# Altium PCB PowerModul_2.PcbDoc
Units mil, origin at the board's own origin, x right, y up, seen from the top; angles counter-clockwise.
Board outline 6030.62 x 3010.62 mil, 4 copper layers (Top Layer, Layer 1, Layer 2, Bottom Layer), stack 23.756 mil thick; 119 components, 43 nets, 313 pads, 578 vias.
Unrouted connection lines stored in the file: 4.
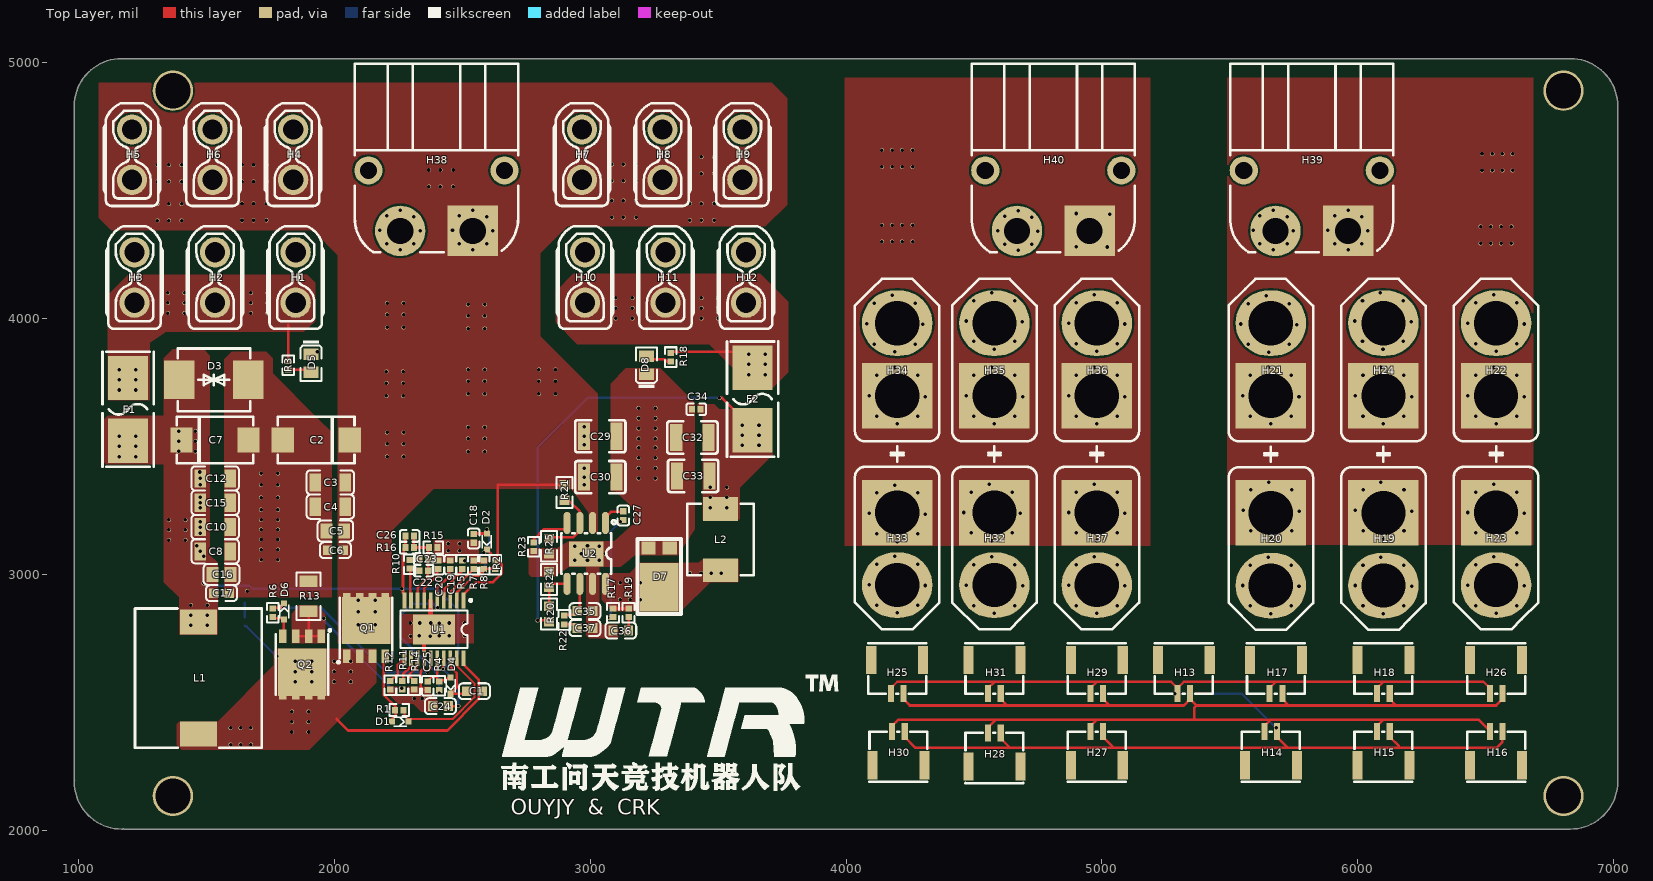
[diagram p0: Top Layer view]
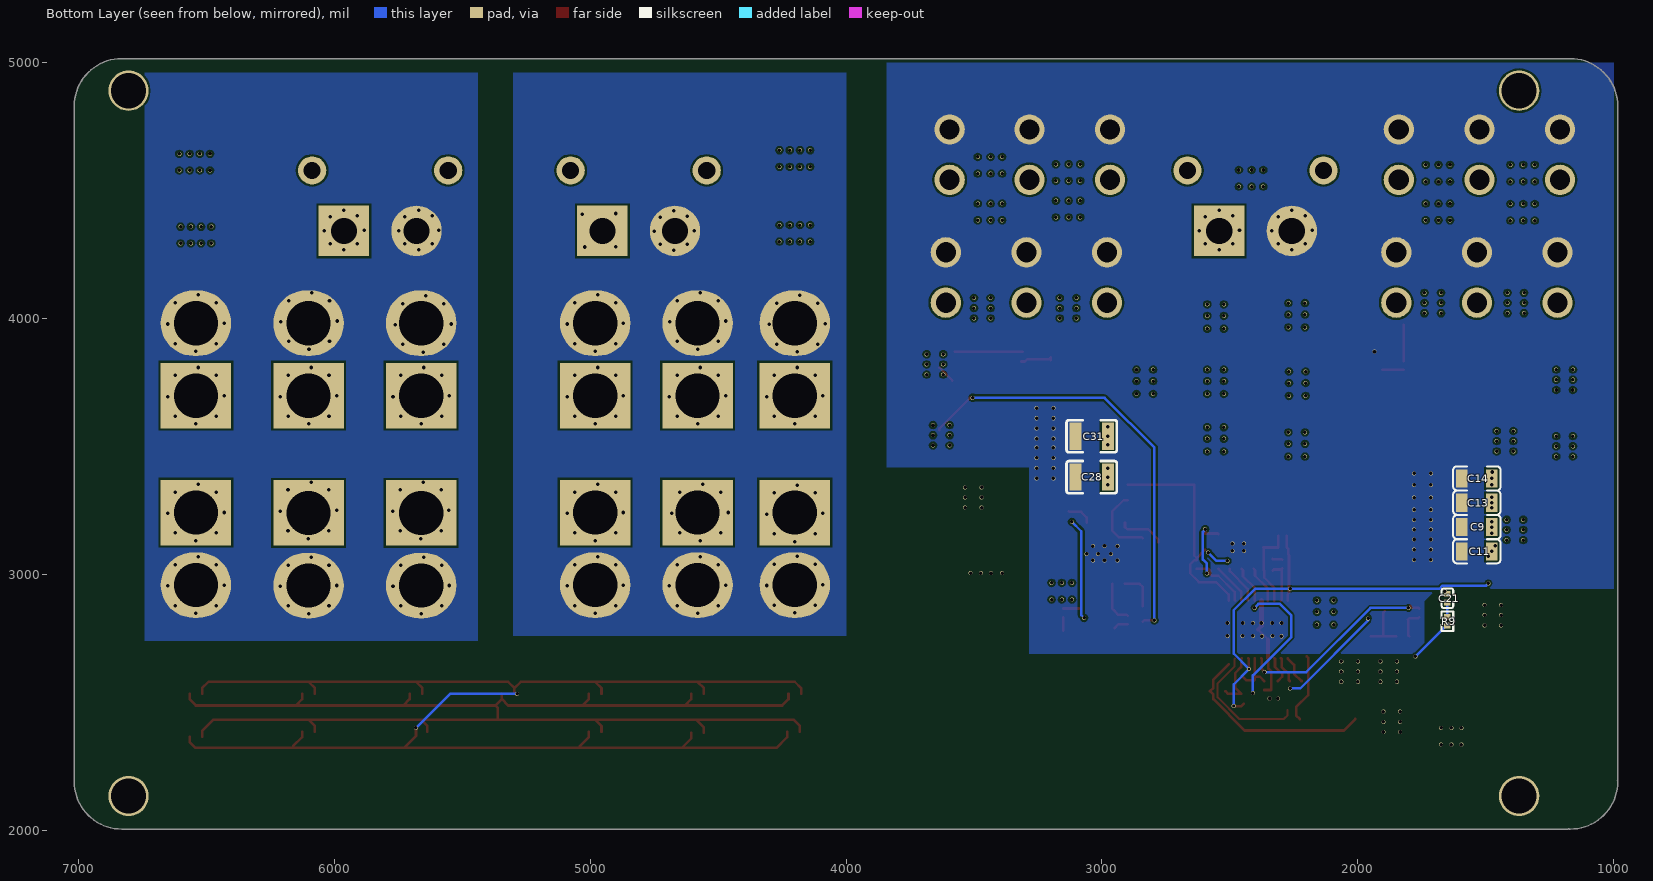
[diagram p1: Bottom Layer view, seen from below]
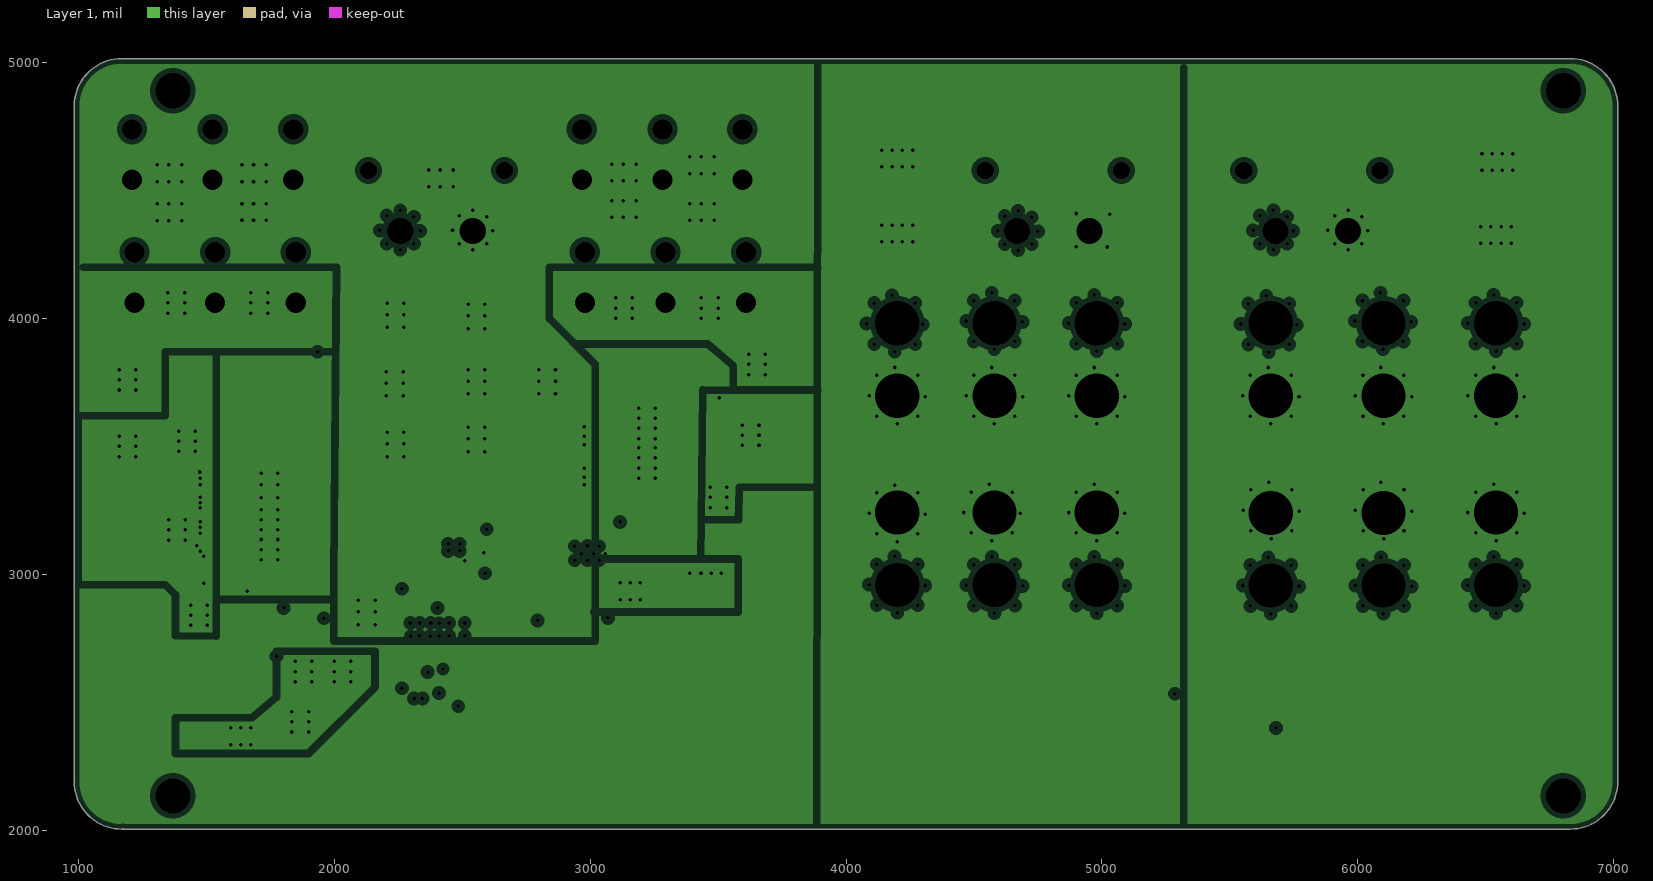
[diagram p2: Layer 1, clearances drawn from the general rule]
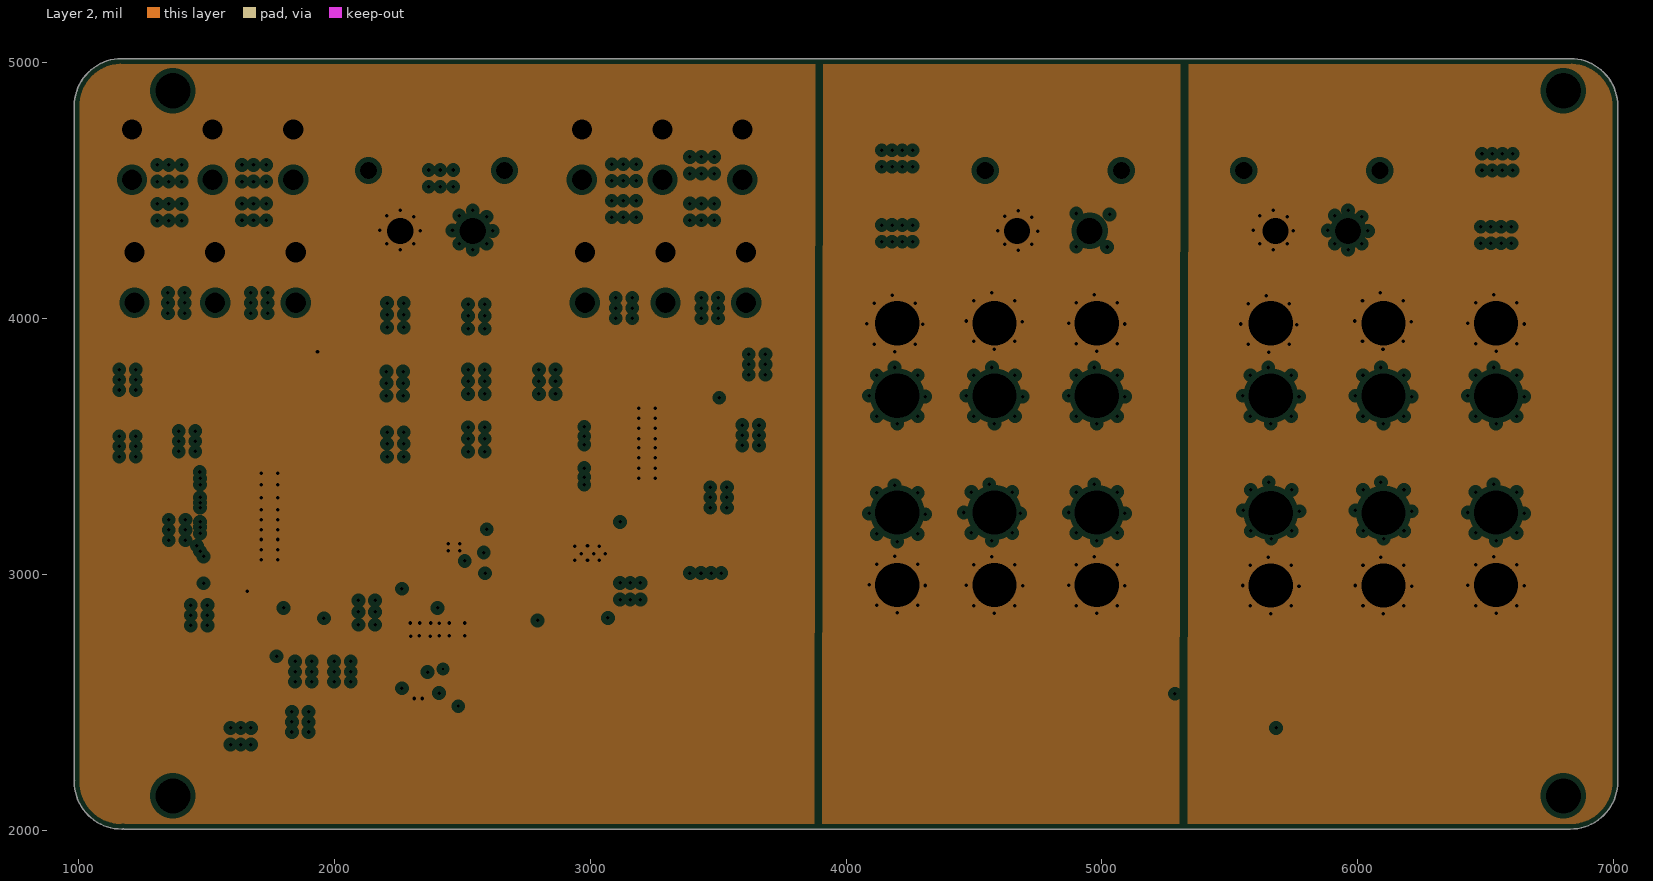
[diagram p3: Layer 2, clearances drawn from the general rule]
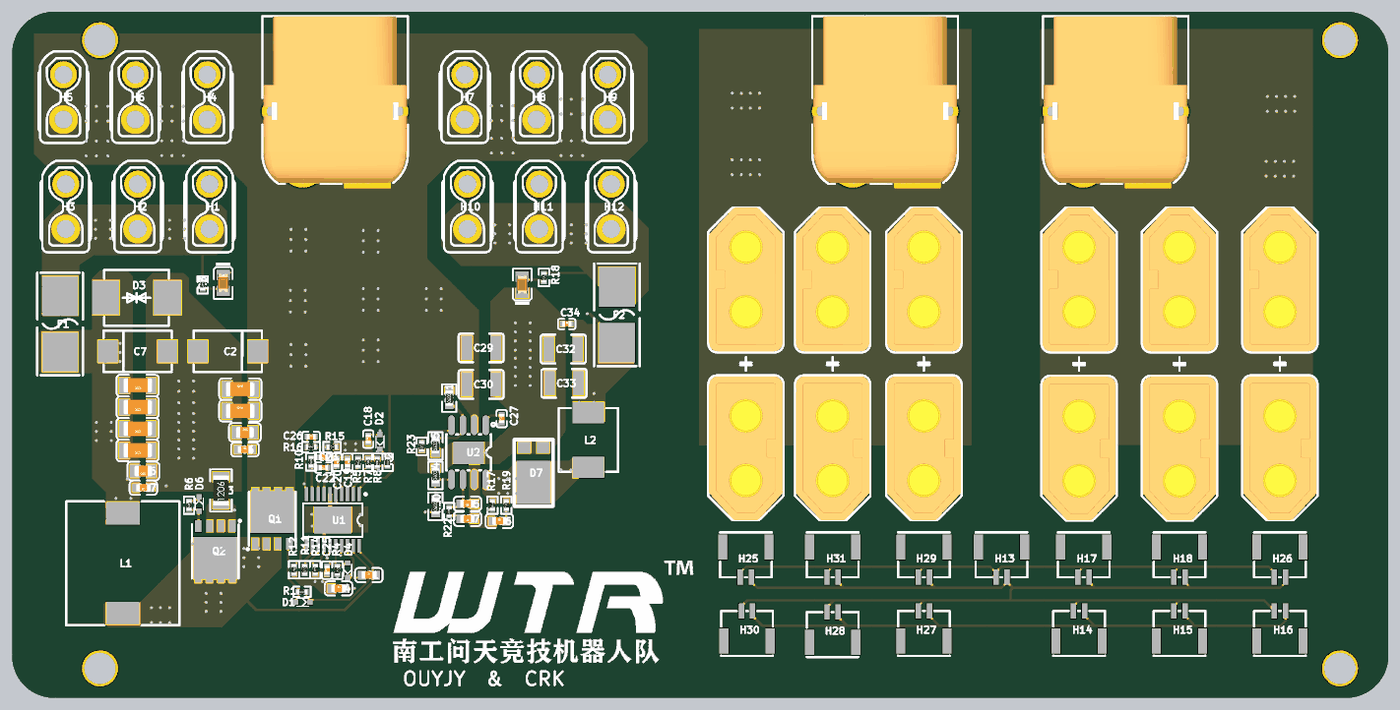
[diagram p4: 3D render of the assembled board from above, using the file's embedded part models]
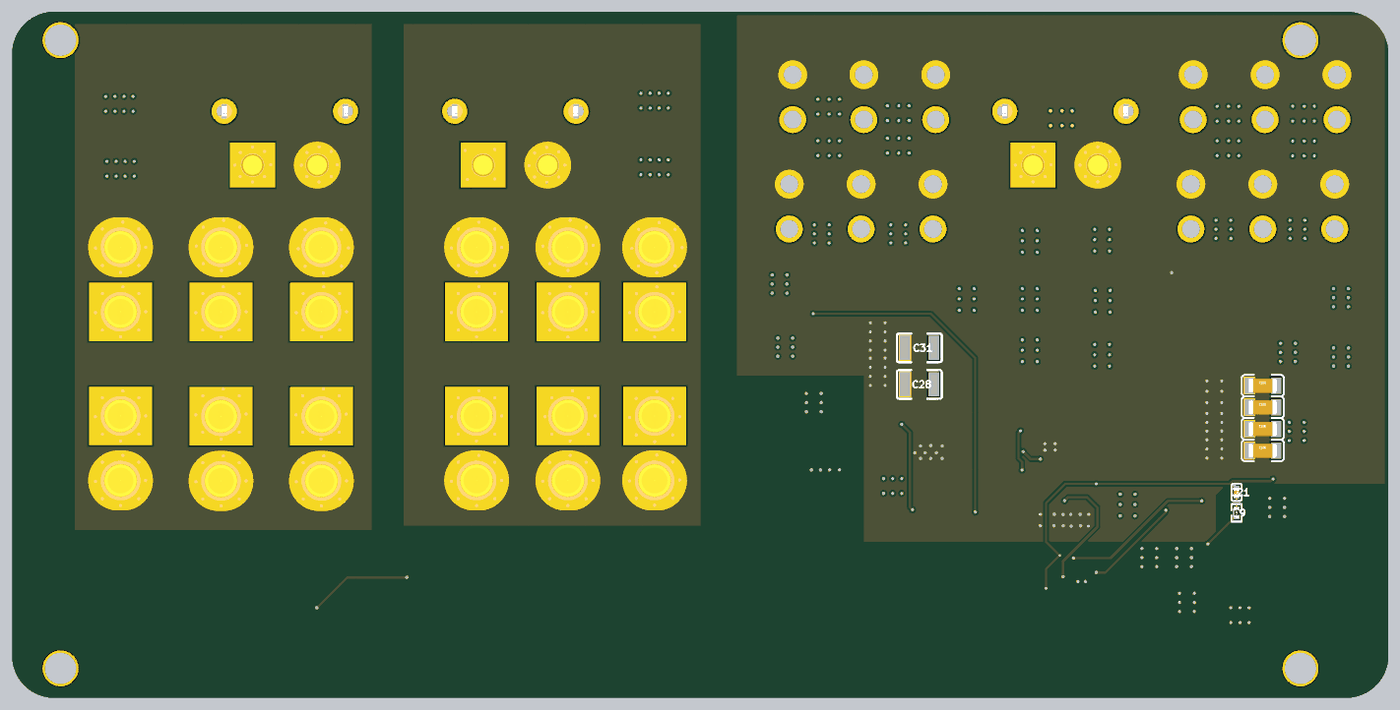
[diagram p5: 3D render of the assembled board from below, using the file's embedded part models]

## Layer stack, top to bottom
Top Solder: solder mask 0.4, Solder Resist, Dk 3.5
Top Layer: signal copper 1.4
Dielectric 2: prepreg 2.8, PP-006, Dk 4.1
Layer 1: plane copper 1.3779, net (Multiple Nets)
Dielectric 1: dielectric 12.6, FR-4, Dk 4.8
Layer 2: plane copper 1.3779, net (Multiple Nets)
Dielectric 3: prepreg 2.8, PP-006, Dk 4.1
Bottom Layer: signal copper 1.4
Bottom Solder: solder mask 0.4, Solder Resist, Dk 3.5

## Board outline
984.69,2190 cw(c999.71,2190) 985.7,2195.42 cw(c1000,2200) 984.99,2200 984.99,4827.04 cw(c999.71,4830) 984.69,4830 cw(c1170,4830) 1170,5015.31 cw(c1170,5000.29) 1172.96,5015.02 6827.04,5015.02 cw(c6830,5000.29) 6830,5015.31 cw(c6830,4830) 7015.31,4830 cw(c7000.29,4830) 7015.02,4827.04 7015.02,2192.96 cw(c7000.29,2190) 7015.31,2190 cw(c6830,2190) 6830,2004.69 cw(c6830,2019.71) 6827.04,2004.98 1180,2004.98 cw(c1180,2020) 1175.42,2005.7 cw(c1170,2019.71) 1170,2004.69 cw(c1170,2190)

## Design rules (kind name [scope] priority, off if disabled: settings)
Clearance [All] p1: gap=8 ignorepadtopadclearanceinfootprint=TRUE
HoleSize [All] p1: absolutevalues=TRUE maxlimit=100 minlimit=6 maxpercent=80.000 minpercent=20.000
MinimumSolderMaskSliver [All] p1: minsoldermaskwidth=0
PlaneClearance [All] p1: clearance=20
PlaneConnect [All] p1: planeconnectstyle=Direct reliefexpansion=20 reliefentries=4 reliefconductorwidth=10 reliefairgap=10
PolygonConnect [All] p1: connectstyle=Direct reliefconductorwidth=10 reliefentries=4 polygonreliefangle="90 Angle" airgapwidth=10
RoutingVias [All] p1: holewidth=11.81 width=15.75 viastyle="Through Hole" minholewidth=11.81 minwidth=15.75 maxholewidth=354.33 maxwidth=393.7
SilkToSilkClearance [All] p1: silktosilkclearance=0
SilkToSolderMaskClearance [IsPad] p1: minsilkscreentomaskgap=0 clearancetoexposedcopper=TRUE
SolderMaskExpansion [All] p1: expansion=4
Width [All] p1: maxlimit=100 minlimit=8 preferedwidth=10 minimp=50.000000 maximp=50.000000 favimp=50.000000
24 further rules are at their usual default settings.

## Components (designator, comment, footprint, x,y, rotation, side; value= is the part's Value field where it differs from the comment)
C1 "1uF 50V 0603" 0603_C 2547.91,2543.5 r0 top
C2 "22uF 35V 钽电容" CAP-SMD_L7.3-W4.3-R-RD 1930,3525 r0 top
C3 "4.7uF 50V 1206" 1206_C 1985,3359.48 r0 top
C4 "4.7uF 50V 1206" 1206_C 1985,3264.48 r0 top
C5 "1uF 50V 0805" 0805_C 2005,3169.48 r0 top
C6 "0.1uF 50V 0603" 0603_C 2005,3094.48 r0 top
C7 "22uF 35V 钽电容" CAP-SMD_L7.3-W4.3-R-RD 1535,3525 r180 top
C8 "22uF 25V" 1206_C 1535,3090 r180 top
C9 "22uF 25V" 1206_C 1535,3185 r180 bottom
C10 "22uF 25V" 1206_C 1535,3185 r180 top
C11 "22uF 25V" 1206_C 1535,3090 r180 bottom
C12 "22uF 25V" 1206_C 1535,3375 r180 top
C13 "22uF 25V" 1206_C 1535,3280 r180 bottom
C14 "22uF 25V" 1206_C 1535,3375 r180 bottom
C15 "22uF 25V" 1206_C 1535,3280 r180 top
C16 "1uF 50V 0805" 0805_C 1560,3000 r180 top
C17 "100nF 50V 0603" 0603_C 1560,2926.5 r180 top
C18 "1uF" 0402_C 2545.2,3140.32 r90 top
C19 "270pF" 0402_C 2454.53,3038.27 r270 top
C20 "10nF" 0402_C 2406.73,3038.27 r270 top
C21 "470pF" 0402_C 1650,2906.73 r270 bottom
C22 "100pF" 0402_C 2350,3015 r180 top
C23 "3.3nF" 0402_C 2350,3060 r180 top
C24 "1uF 0603 50V" 0603_C 2415,2485 r0 top
C25 "1uF" 0402_C 2365,2565 r90 top
C26 "330pF" 0402_C 2295,3150 r0 top
C27 "100nF" 0402_C 3130,3230 r90 top
C28 "4.7uF 1210 50V" C1210 3040,3380 r180 bottom
C29 "4.7uF 1210 50V" C1210 3040,3540 r180 top
C30 "4.7uF 1210 50V" C1210 3040,3380 r180 top
C31 "4.7uF 1210 50V" C1210 3040,3540 r180 bottom
C32 "100uF 6.3V 1210" C1210 3399.91,3535 r0 top
C33 "100uF 6.3V 1210" C1210 3402.9,3384.72 r0 top
C34 "100nF 0402 25V" 0402_C 3415,3645 r0 top
C35 "47pF" 0603_C 2980,2856.34 r180 top
C36 "100pF" 0603_C 3120,2780.46 r0 top
C37 "4.7nF" 0603_C 2980,2790 r180 top
D1 "BAS516" SOD-523_L1.2-W0.8-LS1.6-RD 2258.27,2425 r180 top
D2 "BAS516" SOD-523_L1.2-W0.8-LS1.6-RD 2596.73,3128.27 r90 top
D3 "SMCJ12CA C78808" SMC_L6.9-W5.9-LS7.9-BI 1530,3760 r180 top
D4 "BAS516" SOD-523_L1.2-W0.8-LS1.6-RD 2455,2565 r90 top
D5 "Green" 0805_LED_S1 1910,3825 r270 top
D6 "BAS516" SOD-523_L1.2-W0.8-LS1.6-RD 1805,2855 r270 top
D7 "SVM860VB" TO-277B_3P-L6.1-W4.3-LS7.0-BR 3270,3026.1 r90 top
D8 "Green" 0805_LED_S1 3220,3817.5 r90 top
F1 "FUSE C206921" FUSE-SMD_L9.8-W5.1 1195,3645 r90 top
F2 "FUSE C206916" FUSE-SMD_L9.8-W5.1 3635,3685 r90 top
H1 "2P" XT30UPB-F 1849.92,4160 r90 top
H2 "2P" XT30UPB-F 1534.96,4160 r90 top
H3 "2P" XT30UPB-F 1220,4160 r90 top
H4 "2P" XT30UPB-F 1840,4640 r90 top
H5 "2P" XT30UPB-F 1210.07,4640 r90 top
H6 "2P" XT30UPB-F 1525.04,4640 r90 top
H7 "2P" XT30UPB-F 2968.27,4640 r90 top
H8 "2P" XT30UPB-F 3283.23,4640 r90 top
H9 "2P" XT30UPB-F 3594.96,4640 r90 top
H10 "2P" XT30UPB-F 2980,4160 r90 top
H11 "2P" XT30UPB-F 3294.96,4160 r90 top
H12 "2P" XT30UPB-F 3609.92,4160 r90 top
H13 "2P" GH1.25-S-2P 5320,2600 r180 top
H14 "2P" GH1.25-S-2P 5660,2320 r0 top
H15 "2P" GH1.25-S-2P 6100,2320 r0 top
H16 "2P" GH1.25-S-2P 6540,2320 r0 top
H17 "2P" GH1.25-S-2P 5680,2600 r180 top
H18 "2P" GH1.25-S-2P 6100,2600 r180 top
H19 "2P" TX60-LI-P 6100,3098.27 r270 top
H20 "2P" TX60-LI-P 5660,3098.27 r270 top
H21 "2P" TX60-LI-P 5660,3840 r90 top
H22 "2P" TX60-LI-P 6540,3840 r90 top
H23 "2P" TX60-LI-P 6540,3100 r270 top
H24 "2P" TX60-LI-P 6100,3840 r90 top
H25 "2P" GH1.25-S-2P 4200,2600 r180 top
H26 "2P" GH1.25-S-2P 6540,2600 r180 top
H27 "2P" GH1.25-S-2P 4980,2320 r0 top
H28 "2P" GH1.25-S-2P 4580,2315 r0 top
H29 "2P" GH1.25-S-2P 4980,2600 r180 top
H30 "2P" GH1.25-S-2P 4205,2320 r0 top
H31 "2P" GH1.25-S-2P 4580,2600 r180 top
H32 "2P" TX60-LI-P 4580,3100 r270 top
H33 "2P" TX60-LI-P 4200,3100 r270 top
H34 "2P" TX60-LI-P 4200,3840 r90 top
H35 "2P" TX60-LI-P 4580,3840 r90 top
H36 "2P" TX60-LI-P 4980,3840 r90 top
H37 "2P" TX60-LI-P 4980,3100 r270 top
H38 "2P" TX60PW-M20 2400,4460 r180 top
H39 "2P" TX60PW-M20 5820,4460 r180 top
H40 "2P" TX60PW-M20 4810,4460 r180 top
L1 "10uH 10A C150112" IND-SMD_L13.8-W12.6_SMMS1360 1470,2595 r90 top
L2 "6.8uH 5A" IND-SMD_L7.1-W6.6 3510,3136.1 r90 top
Q1 "BSC067N06LS3" PG-TDSON-8_L5.0-W6.0-P1.27-LS6.2-BL-EP 2125,2791 r0 top
Q2 "BSC067N06LS3" PG-TDSON-8_L5.0-W6.0-P1.27-LS6.2-BL-EP 1875,2647.27 r180 top
R1 "4.7R" 0402_R 2255,2470 r0 top
R2 "100K 0402" 0402_R 2630,3038.27 r90 top
R3 "4.7K" 0402_R 1820,3816.69 r270 top
R4 "511K" 0402_R 2410,2565 r90 top
R5 "1M 0201" 0402_R 2500.2,3038.27 r90 top
R6 "4.7R" 0402_R 1760,2850 r90 top
R7 "12.4K 0402" 0402_R 2545.2,3038.27 r270 top
R8 "10K 0402" 0402_R 2585,3038.27 r270 top
R9 "10R" 0402_R 1650,2816.73 r90 bottom
R10 "17.8K" 0402_R 2295,3040 r90 top
R11 "0R" 0402_R 2266.73,2566.73 r270 top
R12 "10K" 0402_R 2220,2566.73 r90 top
R13 "4mR 1206 1%" 1206_R 1900,2915 r90 top
R14 "0R" 0402_R 2313.35,2566.73 r270 top
R15 "1.21K 1%" 0402_R 2386.73,3105 r180 top
R16 "10.7K 1%" 0402_R 2295,3105 r180 top
R17 "0R" 0402_R 3089.69,2850 r90 top
R18 "1K" 0402_R 3315,3849.04 r270 top
R19 "100R" 0402_R 3150.31,2850 r270 top
R20 "40.2K 0603 1%" 0603_R 2840,2845.31 r90 top
R21 "309K 0603" 0603_R 2900,3320 r90 top
R22 "17.8K" 0402_R 2900,2821.73 r270 top
R23 "243K" 0402_R 2780,3108.27 r90 top
R24 "7.68K 0603 1%" 0603_R 2840,2980.31 r90 top
R25 "68K 0603" 0603_R 2840,3110 r90 top
U1 "LM25116MHX/NOPB" HTSSOP-20_L6.5-W4.4-P0.65-LS6.4-BL-EP 2390,2785 r180 top
U2 "TPS54540DDAR" SOIC-8-EP 2985,3082 r180 top
? "Comment" WTR_LOGO 2660,2160 r0 top

## Footprints (in the part's own frame and the unit in brackets; to place one, negate y for a bottom-side part, rotate by r counter-clockwise, add the part's x,y. Pads: shape width x height; smd on the part's side, far side on the other; paste and mask are expansions set on the pad)
0402_C [mm]
  rect 0.6x0.65 smd mask+0.051: 1(-0.425,0) 2(0.425,0)
  silkscreen extent -0.97,-0.58 0.98,0.58, body extent -0.48,-0.3 0.52,0.3, height 0.2
0402_R [mm]
  rect 0.6x0.65 smd mask+0.051: 1(-0.425,0) 2(0.425,0)
  silkscreen extent -0.97,-0.58 0.98,0.58, body extent -0.57,-0.27 0.58,0.28, height 0.41
0603_C [mm]
  rect 0.93x0.98 smd: 1(-0.77,0) 2(0.77,0)
  silkscreen extent -1.54,-0.79 1.54,0.79, body extent -0.8,-0.4 0.8,0.4, height 0.3
0603_R [mm]
  rect 0.93x0.98 smd: 1(-0.77,0) 2(0.77,0)
  silkscreen extent -1.53,-0.79 1.54,0.79, body extent -0.85,-0.4 0.85,0.4, height 0.56
0805_C [mm]
  rect 1.16x1.47 smd: 1(-0.89,0) 2(0.89,0)
  silkscreen extent -1.77,-1.04 1.77,1.04, body extent -1,-0.62 1,0.63, height 0.77
0805_LED_S1 [mm]
  rect 1.16x1.47 smd: A(0.89,0) K(-0.89,0)
  silkscreen extent -2.24,-1.04 1.77,1.03, body extent -1.01,-0.62 1.01,0.62, height 1.1
1206_C [mm]
  rect 1.13x1.8 smd: 1(-1.49,0) 2(1.49,0)
  silkscreen extent -2.36,-1.2 2.35,1.2, body extent -1.6,-0.81 1.6,0.79, height 1
1206_R [mm]
  rect 1.13x1.8 smd: 1(-1.49,0) 2(1.49,0)
  silkscreen extent -2.36,-1.2 2.35,1.2, body extent -1.7,-0.86 1.65,0.87, height 0.85
C1210 [mm]
  rect 1.2x2.7 smd: 1(-1.6,0) 2(1.6,0)
  silkscreen extent -2.5,-1.6 2.5,1.6
CAP-SMD_L7.3-W4.3-R-RD [mm]
  rect 2.2x2.5 smd: 1(3.325,0) 2(-3.325,0)
  silkscreen extent -3.8,-2.3 3.8,2.34
FUSE-SMD_L9.8-W5.1 [mm]
  rect 4.4x4 smd: 1(-3.11,0) 2(3.11,0)
  silkscreen extent -5.71,-2.54 5.71,2.54
GH1.25-S-2P [mm]
  rect 0.6x1.7 smd: 1(0.625,1.675) 2(-0.625,1.675)
  rect 1x2.8 smd: 3(2.575,-1.675) 4(-2.575,-1.675)
  silkscreen extent -2.88,-3.33 2.88,1.68
HTSSOP-20_L6.5-W4.4-P0.65-LS6.4-BL-EP [mil]
  rect 14.5x61.5 smd: 1(-115.16,-113) 2(-89.57,-113) 3(-63.98,-113) 4(-38.39,-113) 5(-12.8,-113) 6(12.8,-113) 7(38.39,-113) 8(63.98,-113) 9(89.57,-113) 10(115.16,-113) 11(115.16,113) 12(89.57,113) 13(63.98,113) 14(38.39,113) 15(12.8,113) 16(-12.8,113) 17(-38.39,113) 18(-63.98,113) 19(-89.57,113) 20(-115.16,113)
  rect 165.35x118.11 smd: 21(0,0)
  silkscreen extent -149,-118 130,73
IND-SMD_L7.1-W6.6 [mm]
  rect 2.35x3.5 smd: 1(-3.035,0) 2(3.035,0)
  silkscreen extent -3.55,-3.3 3.55,3.3
IND-SMD_L13.8-W12.6_SMMS1360 [mm]
  rect 2.5x3.7 smd: 1(-5.565,0) 2(5.565,0)
  silkscreen extent -6.9,-6.3 6.9,6.3
PG-TDSON-8_L5.0-W6.0-P1.27-LS6.2-BL-EP [mil]
  rect 29.5x51.2 smd: 1(-75,-111) 2(-25,-111) 3(25,-111) 4(75,-111) 5(75,111) 6(25,111) 7(-25,111) 8(-75,111)
  rect 189x185 smd: 9(0,29)
  silkscreen extent -112,-138 102,118
SMC_L6.9-W5.9-LS7.9-BI [mm]
  rect 3.03x3.82 smd: 1(-3.435,0) 2(3.435,0)
  silkscreen extent -3.6,-3.11 3.6,3.11
SOD-523_L1.2-W0.8-LS1.6-RD [mm]
  rect 0.6x0.6 smd: 1(0.8,0) 2(-0.8,0)
  silkscreen extent -0.65,-0.45 0.65,0.45
SOIC-8-EP [mm]
  oval 0.7x2.2 smd: 1(-1.905,-3.023) 2(-0.635,-3.023) 3(0.635,-3.023) 4(1.905,-3.023) 5(1.905,3.023) 6(0.635,3.023) 7(-0.635,3.023) 8(-1.905,3.023)
  rect 3.4x2.5 smd: 9(0,0.051)
  silkscreen extent -2.93,-3.29 2.5,2
TO-277B_3P-L6.1-W4.3-LS7.0-BR [mil]
  rect 50.8x56 smd: 1(76.1,-41.6) 2(76.1,41.6)
  rect 188.98x149.61 smd: 3(-76.1,0)
  silkscreen extent -180,-85 112,85
TX60-LI-P [mm] "长：16mm，宽：8.2mm，高：16mm"
  rect 6.5x7 hole 4.4: 1(-3.6,0)
  oval 6.5x7 hole 4.4: 2(3.6,0)
  silkscreen extent -10.16,-4.19 8,4.19, body extent -8,-4.1 8,4.1, height 15.85
TX60PW-M20 [mm] "长：18.8mm， 宽：16mm，高：8.6mm"
  round 2.8 hole 1.7: 0(-6.75,-3) 0(6.75,-3)
  rect 5x5 hole 2.6: 1(-3.6,3)
  round 5 hole 2.6: 2(3.6,3)
  silkscreen extent -8.1,-13.6 8.1,5.1, body extent -8,-13.6 8,5.02, height 8.65
WTR_LOGO [mil]
  silkscreen extent -7,-4 1309,447
XT30UPB-F [mm]
  round 3 hole 2: 1(-2.499,0) 2(2.501,0)
  silkscreen extent -5.1,-2.8 5.1,2.8

## Part data
C1 C3 C4 C5 C6 C8 C9 C10 C11 C12 C13 C14 C15 C16 C17 C18 C19 C20 C21 C22 C23 C24 C25 C26 C27 C28 C29 C30 C31 C32 C33 C34 C35 C36 C37: library part C, "贴片电容", Package=1206, SuppliersPartNumber=C1868, ComponentLink1Description=供?, ComponentLink1URL=http://www.szlcsc.com/product/details_2220.html, Supplier=LC
C2 C7: library part Cp, "极性电容", Package=3216, SuppliersPartNumber=C7171, Supplier=LC
  C2: ComponentLink2Description=C122325, ComponentLink2URL=C122325
  C7: ComponentLink1Description=供?, ComponentLink1URL=http://www.szlcsc.com/product/details_7643.html
D1 D2 D4 D6: library part D, "二极管", Package=SOD-323, SuppliersPartNumber=C2128, ComponentLink1Description=供?, ComponentLink1URL=http://www.szlcsc.com/product/details_2485.html, Supplier=LC
D3: library part TVS, "TVS", Package=SMB/DO-214AA, SuppliersPartNumber=C78395, ComponentLink1Description=供?, ComponentLink1URL=http://www.szlcsc.com/product/details_79530.html, Supplier=LC
D5 D8: library part LED, "发光二极管", Package=0805, SuppliersPartNumber=C2293, ComponentLink1Description=供?, ComponentLink1URL=http://www.szlcsc.com/product/details_2666.html, Supplier=LC
D7: library part Ds3, "肖特基二极管"
F1 F2: library part FUSE, "熔断器"
L1 L2: library part L, "电感"
Q1 Q2: library part CSD18563Q5AT, BOM_Manufacturer="Texas Instruments", BOM_Manufacturer Part=CSD18563Q5AT, BOM_Supplier=LCSC, BOM_Supplier Part=C140227, Contributor=LCSC, spicePre=Q, spiceSymbolName=CSD18563Q5AT
R1 R2 R3 R4 R5 R6 R7 R8 R9 R10 R11 R12 R13 R14 R15 R16 R17 R18 R19 R20 R21 R22 R23 R24 R25: library part R, "贴片电阻"
U1: BOM_Manufacturer="Texas Instruments", BOM_Manufacturer Part=LM25116MHX/NOPB, BOM_Supplier=LCSC, BOM_Supplier Part=C390951, Contributor=LCSC, spicePre=U, spiceSymbolName=LM25116MHX/NOPB
U2: BOM_LCSC Assembly=Yes, BOM_Manufacturer=TI, BOM_Manufacturer Part=TPS54540DDAR, BOM_Supplier=LCSC, BOM_Supplier Part=C95286, SMT Type=Extend, spicePre=U, spiceSymbolName=TPS54540DDAR

## Free pads (board coordinates)
  round 157.48 hole 137.8: ""(1370,2134.09) ""(1370,4890) ""(6803.07,2134.09) ""(6803.07,4890)

## Via types
v1: diameter 15.75, hole 13.78, Top Layer to Bottom Layer, tented both sides, 576 vias
v2: diameter 15.75, hole 11.81, Top Layer to Bottom Layer, tented both sides, 2 vias

## Nets (pads, with @x,y where several pads share a name; then routed paths per layer and width w, separated by ;. In a path a pad name is that pad's centre, name@x,y a point inside that pad or via, vN(x,y) a via of type N, cw(c..) or ccw(c..) an arc to the next point about the centre after c; other vN are vias at no path point)
+5: C32.2 C33.2 C34.2 F2.1 L2.2 R20.1 | length 1700.2
  Top Layer w10: v1(2795,2820) 2835,2820 R20.1 ; v1(3505,3690) 3515.43,3690 3635,3570.43 F2.1
  Bottom Layer w10: v1(2795,2820) 2795,3495 2990,3690 v1(3505,3690)
  other v1: 3469.84,3260.43 3534.84,3260.43 3469.84,3300.47 3534.84,3300.47 3469.84,3340 3534.84,3340 3595.07,3503.63 3660.07,3503.63 3595.07,3543.67 3660.07,3543.67 3595.07,3583.19 3660.07,3583.19
+5F: F2.2 H10.1 H11.1 H12.1 R18.1 | length 336
  Top Layer w10: R18.1@3310,3869.23 F2.2@3574.29,3869.23 ; F2.2@3584.29,3756.73 F2.2
  other v1: 3620,3780.43 3685,3780.43 3620,3820.47 3685,3820.47 3620,3860 3685,3860 3100,4000.43 3165,4000.43 3435,4000.43 3500,4000.43 3100,4040.47 3165,4040.47 3435,4040.47 3500,4040.47 3100,4080 3165,4080 3435,4080 3500,4080
+12: C7.1 C8.2 C9.2 C10.2 C11.2 C12.2 C13.2 C14.2 C15.2 C16.2 C17.2 C24.2 C26.1 D3.2 F1.1 L1.2 R16.2 U1.10 U1.17 | length 1810.7
  Top Layer w10: U1.10@2273.29,2899.56 U1.10 2274.84,2921.5 2269.2,2927.14 2269.2,3073.93 2272.48,3077.2 2272.48,3099.21 R16.2 C26.1 ; v2(2425,2630) 2425,2631.56 2426.14,2632.69 2426.14,2669.75 U1.17 ; C24.2@2445.31,2495 2455.31,2485 v2(2485,2485)
  Bottom Layer w10: v1(1490,2965) 1499.13,2955.87 1668.65,2955.87 1680.77,2943.75 v1(2265,2943.75) 2401.25,2943.75 2485,2860 2485,2690 v2(2425,2630) 2485,2570 v2(2485,2485)
  other v1: 1440,2800.43 1505,2800.43 1440,2840.47 1505,2840.47 1440,2880 1505,2880 1490,3070 1476.34,3090 1463.73,3111.73 1353.93,3133.7 1418.93,3133.7 1476.34,3160 1353.93,3173.74 1418.93,3173.74 1476.34,3185 1476.34,3204.74 1353.93,3213.27 1418.93,3213.27 1476.34,3260 1476.34,3280 1476.34,3300.47 1476.34,3350 1476.34,3375 1475.05,3400 1160,3460.43 1225,3460.43 1392.53,3480.43 1457.53,3480.43 1160,3500.47 1225,3500.47 1392.53,3520.47 1457.53,3520.47 1160,3540 1225,3540 1392.53,3560 1457.53,3560
+12F: F1.2 H1.1 H2.1 H3.1 R3.1 | length 141.6
  Top Layer w10: R3.1 1820,3975
  other v1: 1160,3720.43 1225,3720.43 1160,3760.47 1225,3760.47 1160,3800 1225,3800 1350.66,4020.43 1415.66,4020.43 1675,4020.43 1740,4020.43 1350.66,4060.47 1415.66,4060.47 1675,4060.47 1740,4060.47 1350.66,4100 1415.66,4100 1675,4100 1740,4100
+24: C2.1 C3.2 C4.2 C5.2 C6.2 C28.2 C29.2 C30.2 C31.2 D2.2 H4.1 H5.1 H6.1 H7.1 H8.1 H9.1 H38.1 Q1.5 Q1.6 Q1.7 Q1.8 Q1.9 R2.2 R5.2 R21.2 U1.1 U2.2 | length 979.7
  Top Layer w10: U1.1 2505.16,2921.5 2553.66,2970 2621.46,2970 2655.8,3004.34 2655.8,3038.73 2639.53,3055 R2.2 ; D2.2 2629.02,3064.49 2629.02,3055 R2.2 ; R21.2 2639.53,3350.32 2639.53,3074.53 2630,3065 R2.2
  Bottom Layer w10: v1(2510,3052.5) 2552.5,3052.5 v1(2585,3085)
  other v1: 2095,2803.27 2160,2803.27 2095,2853.27 2160,2853.27 2095,2898.27 2160,2898.27 2977.01,3350 2977.01,3380 2977.01,3415.43 2206.73,3460 2271.73,3460 2523.56,3480 2588.56,3480 2977.01,3507.2 2206.73,3510 2271.73,3510 2523.56,3530 2588.56,3530 2977.01,3540 2206.73,3555 2271.73,3555 2523.56,3575 2588.56,3575 2977.01,3577 2204.2,3697.5 2269.2,3697.5 2523.56,3705 2588.56,3705 2800,3705 2865,3705 2269.2,3747.5 2204.2,3747.5 2523.56,3755 2588.56,3755 2800,3755 2865,3755 2204.2,3792.5 2269.2,3792.5 2523.56,3800 2588.56,3800 2800,3800 2865,3800 2523.56,3960 2588.56,3960 2206.73,3965 2271.73,3965 2523.56,4010 2588.56,4010 2206.73,4015 2271.73,4015 2523.56,4055 2588.56,4055 2206.73,4060 2271.73,4060 2541.73,4268.29 2489.21,4291.89 2595.43,4291.89 2619.21,4341.89 2462.56,4343.78 1309.1,4382.33 1354.1,4382.33 1404.1,4382.33 1640,4383.64 1685,4383.64 1735,4383.64 3390,4383.64 3435,4383.64 3485,4383.64 3085,4395 3130,4395 3180,4395 2595.43,4396.89 2489.21,4401.89 2541.73,4421.89 1309.1,4447.33 1354.1,4447.33 1404.1,4447.33 1640,4448.64 1685,4448.64 1735,4448.64 3390,4448.64 3435,4448.64 3485,4448.64 3085,4460 3130,4460 3180,4460 2370,4515 2415,4515 2465,4515 1309.1,4535 1354.1,4535 1404.1,4535 1640,4535 1685,4535 1735,4535 3085,4537.38 3130,4537.38 3180,4537.38 3390,4565.84 3435,4565.84 3485,4565.85 2370,4580 2415,4580 2465,4580 1309.1,4600 1354.1,4600 1404.1,4600 1640,4600 1685,4600 1735,4600 3085,4602.38 3130,4602.38 3180,4602.38 3390,4630.84 3435,4630.84 3485,4630.84
+24_1: H32.1 H33.1 H34.1 H35.1 H36.1 H37.1 H40.1
  other v1: 4200,3128.27 4570,3131.73 4980,3131.73 4120,3158.27 4280,3158.27 4490,3161.73 4650,3161.73 4900,3161.73 5060,3161.73 4310,3234.8 4090,3238.27 4680,3238.27 5090,3238.27 4460,3241.73 4870,3241.73 4120,3318.27 4280,3318.27 4490,3321.73 4650,3321.73 4900,3321.73 5060,3321.73 4190,3348.27 4560,3351.73 4970,3351.73 4200,3588.27 4580,3588.27 4980,3588.27 4120,3618.27 4280,3618.27 4500,3618.27 4660,3618.27 4900,3618.27 5060,3618.27 4310,3694.8 4690,3694.8 5090,3694.8 4090,3698.27 4470,3698.27 4870,3698.27 4120,3778.27 4280,3778.27 4500,3778.27 4660,3778.27 4900,3778.27 5060,3778.27 4190,3808.27 4570,3808.27 4970,3808.27 5020,4279.14 4900,4281.03 4140,4300 4180,4300 4219.57,4300 4260,4300 4140,4365 4180,4365 4219.57,4365 4260,4365 5030,4406.53 4900,4410 4140,4592.37 4180,4592.37 4219.57,4592.37 4260,4592.37 4140,4657.37 4180,4657.37 4219.57,4657.37 4260,4657.37
+24_2: H19.1 H20.1 H21.1 H22.1 H23.1 H24.1 H39.1
  other v1: 6540,3131.73 5661.57,3140 6100.2,3140 6460,3161.73 6620,3161.73 5581.57,3170 5741.57,3170 6020.2,3170 6180.2,3170 6650,3238.27 6430,3241.73 5771.57,3246.54 6210.2,3246.54 5551.57,3250 5990.2,3250 6460,3321.73 6620,3321.73 5581.57,3330 5741.57,3330 6020.2,3330 6180.2,3330 6530,3351.73 5651.57,3360 6090.2,3360 5660,3588.27 6100,3588.27 6540,3588.27 5580,3618.27 5740,3618.27 6020,3618.27 6180,3618.27 6460,3618.27 6620,3618.27 5770,3694.8 6210,3694.8 6650,3694.8 5550,3698.27 5990,3698.27 6430,3698.27 5580,3778.27 5740,3778.27 6020,3778.27 6180,3778.27 6460,3778.27 6620,3778.27 5650,3808.27 6090,3808.27 6530,3808.27 5961.73,4268.29 5909.21,4291.89 6015.43,4291.89 6480,4293.42 6520,4293.42 6559.57,4293.42 6600,4293.42 6039.21,4341.89 5882.56,4343.78 6480,4358.42 6520,4358.42 6559.57,4358.42 6600,4358.42 6015.43,4396.89 5909.21,4401.89 5961.73,4421.89 6485,4578.11 6525,4578.11 6564.57,4578.11 6605,4578.11 6485,4643.11 6525,4643.11 6564.57,4643.11 6605,4643.11
CAN_H: H13.2 H14.2 H15.2 H16.2 H17.2 H18.2 H25.2 H26.2 H27.2 H28.2 H29.2 H30.2 H31.2 | length 5383.6
  Top Layer w10: H30.2 4180.39,2407.6 4205.2,2432.41 4585.2,2432.41 ; H25.2 4224.61,2512.41 4249.42,2487.59 4640,2487.59 ; H28.2 4555.39,2402.6 4585.2,2432.41 ; H31.2 4604.61,2512.4 4629.42,2487.59 4640,2487.59 ; H27.2 4955.39,2407.6 4980,2432.21 4980,2432.41 ; H29.2 5004.61,2512.41 5029.42,2487.59 ; H13.2 H13.2@5344.61,2512.41 ; H14.2 5635.39,2407.6 5660,2432.21 5660,2432.41 ; H17.2 5704.61,2512.4 5729.42,2487.59 ; H15.2 6075.39,2407.6 6100,2432.21 6100,2432.41 ; H18.2 6124.61,2512.4 6149.42,2487.59 ; H16.2@6515.39,2365.95 6515.39,2387.59 6470.58,2432.41 6100,2432.41 ; H26.2 6564.61,2512.4 6539.8,2487.59 6149.42,2487.59 ; 4585.2,2432.41 4980,2432.41 ; 4640,2487.59 5029.42,2487.59 ; 4980,2432.41 5360,2432.41 ; 5029.42,2487.59 5319.8,2487.59 H13.2@5344.61,2512.4 ; H13.2@5344.61,2512.41 5369.42,2487.59 ; 5360,2432.41 5660,2432.41 ; 5360,2432.41 5360,2478.17 5369.42,2487.59 ; 5369.42,2487.59 5729.42,2487.59 ; 5660,2432.41 6100,2432.41 ; 5729.42,2487.59 6149.42,2487.59
CAN_L: H13.1 H14.1 H15.1 H16.1 H17.1 H18.1 H25.1 H26.1 H27.1 H28.1 H29.1 H30.1 H31.1 | length 5869
  Top Layer w10: H25.1 4175.39,2555.71 4200.2,2580.52 4580,2580.52 ; H30.1 4229.61,2364.29 4271.73,2322.17 4641.73,2322.17 ; H31.1 4555.39,2555.71 4580,2580.32 4580,2580.52 ; H28.1 4604.61,2359.29 4641.73,2322.17 ; H29.1 4955.39,2555.71 4980.2,2580.52 ; H27.1 5004.61,2364.29 5040,2328.9 5040,2322.17 ; v1(5285.28,2533.5) 5288.89,2533.5 H13.1@5295.39,2540 ; H13.1 H13.1@5295.39,2540 ; H17.1 5655.39,2555.71 5680.2,2580.52 ; v1(5680.2,2400) 5680.2,2368.71 5726.73,2322.17 ; H18.1 6075.39,2555.71 6100.2,2580.52 ; H15.1 6124.61,2364.29 6160,2328.9 6160,2322.17 ; H26.1 6515.39,2555.71 6490.58,2580.52 6100.2,2580.52 ; H16.1@6564.61,2365.95 6564.61,2344.29 6542.5,2322.17 6160,2322.17 ; 4580,2580.52 4980.2,2580.52 ; 4641.73,2322.17 5040,2322.17 ; 4980.2,2580.52 5270.58,2580.52 H13.1@5295.39,2555.71 ; 5040,2322.17 5726.73,2322.17 ; H13.1@5295.39,2540 H13.1@5295.39,2555.71 ; H13.1@5295.39,2555.71 5320.2,2580.52 5680.2,2580.52 ; 5680.2,2580.52 6100.2,2580.52 ; 5726.73,2322.17 6160,2322.17
  Bottom Layer w10: v1(5285.28,2533.5) 5546.69,2533.5 v1(5680.2,2400)
FB: R20.2 R24.1 U2.5 | length 149.8
  Top Layer w10: R20.2 R24.1 2853,2963 U2.5
GND: C2.2 C3.1 C4.1 C5.1 C6.1 C7.2 C8.1 C9.1 C10.1 C11.1 C12.1 C13.1 C14.1 C15.1 C16.1 C17.1 C18.1 C19.1 C20.1 C21.1 C24.1 C25.1 C28.1 C29.1 C30.1 C31.1 C32.1 C33.1 C34.1 C35.1 C36.1 C37.1 D3.1 D5.K D7.1 D7.2 D8.K H1.2 H2.2 H3.2 H4.2 H5.2 H6.2 H7.2 H8.2 H9.2 H10.2 H11.2 H12.2 H38.2 R7.1 R8.1 R12.1 R13.2 R14.2 R15.1 R23.1 R24.2 R25.1 U1.6 U1.14 U1.21 U2.7 U2.9 | length 398.2
  Top Layer w10: U1.14@2349.36,2669.75 2349.36,2632.15 2339.2,2621.99 2339.2,2549.06 2340,2548.27 C25.1 ; U1.21@2351.61,2746.61 U1.21
  Top Layer w15: U1.14 U1.21@2351.61,2746.61 ; U1.21@2377.2,2797.8 U1.21
  Top Layer w20: U1.21@2377.2,2797.8 U1.6
  other v1: 2312.36,2515 2345,2515 2299.13,2758.27 2374.95,2758.27 2333.27,2760 2410,2760 2450,2760 2510,2760 2410,2809.13 2298.18,2810 2335,2810 2377.2,2810 2448.91,2810 2510,2810 1660,2935 2940,3055 2990,3055 3035,3055 1715,3056.73 1780,3056.73 2965,3080 3014.74,3080 3060,3079.69 2445,3091.54 2490,3091.54 1715,3096.77 1780,3096.77 2940,3110 3035,3110 2990,3111.73 2445,3120 2490,3120 1715,3136.3 1780,3136.3 1715,3175 1780,3175 1715,3213.27 1780,3213.27 1715,3252.5 1780,3252.5 1715,3300 1780,3300 1715,3350 1780,3350 3190,3375 3255,3375 1715,3395 1780,3395 3190,3415.43 3255,3415.43 3190,3455 3255,3455 3190,3495 3255,3495 3190,3530 3255,3530 3190,3570.43 3255,3570.43 3190,3610 3255,3610 3190,3650 3255,3650 1935,3870 2258.27,4268.29 2205.75,4291.89 2311.96,4291.89 2335.75,4341.89 2179.1,4343.78 2311.96,4396.89 2205.75,4401.89 2258.27,4421.89
GND1: H32.2 H33.2 H34.2 H35.2 H36.2 H37.2 H40.2
  other v1: 4580,2848.27 4980,2848.27 4200,2850 4500,2878.27 4660,2878.27 4900,2878.27 5060,2878.27 4120,2880 4280,2880 4690,2954.8 5090,2954.8 4310,2956.54 4470,2958.27 4870,2958.27 4090,2960 4500,3038.27 4660,3038.27 4900,3038.27 5060,3038.27 4120,3040 4280,3040 4570,3068.27 4970,3068.27 4190,3070 4190.16,3870 4980,3871.73 4579.49,3880 4110.16,3900 4270.16,3900 4900,3901.73 5060,3901.73 4499.49,3910 4659.49,3910 4300.16,3976.54 5090,3978.27 4080.16,3980 4870,3981.73 4689.49,3986.54 4469.49,3990 4110.16,4060 4270.16,4060 4900,4061.73 5060,4061.73 4499.49,4070 4659.49,4070 4180.16,4090 4970,4091.73 4569.49,4100 4672.52,4266.4 4620,4290 4726.22,4290 4750,4340 4593.35,4341.89 4726.22,4395 4620,4400 4672.52,4420
GND2: H19.2 H20.2 H21.2 H22.2 H23.2 H24.2 H39.2
  other v1: 5660,2846.54 6100,2846.54 6540,2848.27 5580,2876.54 5740,2876.54 6020,2876.54 6180,2876.54 6460,2878.27 6620,2878.27 5770,2953.07 6210,2953.07 6650,2954.8 5550,2956.54 5990,2956.54 6430,2958.27 5580,3036.54 5740,3036.54 6020,3036.54 6180,3036.54 6460,3038.27 6620,3038.27 5650,3066.54 6090,3066.54 6530,3068.27 5651.57,3868.27 6540,3871.73 6098.12,3880 5571.57,3898.27 5731.57,3898.27 6460,3901.73 6620,3901.73 6018.12,3910 6178.12,3910 5761.57,3974.8 5541.57,3978.27 6650,3978.27 6430,3981.73 6208.12,3986.54 5988.12,3990 5571.57,4058.27 5731.57,4058.27 6460,4061.73 6620,4061.73 6018.12,4070 6178.12,4070 5641.57,4088.27 6530,4091.73 6088.12,4100 5669.84,4268.29 5617.32,4291.89 5723.54,4291.89 5747.32,4341.89 5590.67,4343.78 5723.54,4396.89 5617.32,4401.89 5669.84,4421.89
NetC1_1: C1.1 D4.2 U1.18 | length 226.2
  Top Layer w10: U1.18 2456.23,2669.75 2456.23,2637.28 2479.81,2613.69 2479.81,2558.32 D4.2 2507.6,2533.5 C1.1
NetC1_2: C1.2 L1.1 Q1.1 Q1.2 Q1.3 Q2.5 Q2.6 Q2.7 Q2.8 Q2.9 R9.1 U1.20 | length 971
  Top Layer w10: 2010,2435 2055,2390 2442.7,2390 2564.92,2512.22 2564.92,2530.2 C1.2 2564.92,2556.81 2564.92,2588.74 U1.20@2505.16,2648.5
  Bottom Layer w10: R9.1 1652.8,2797.2 1657.8,2797.2 v1(1775,2680)
  other v1: 1595.43,2335 1634.96,2335 1675,2335 1835,2384.14 1900,2384.14 1595.43,2400 1634.96,2400 1675,2400 1835,2423.66 1900,2423.66 1835,2463.7 1900,2463.7 1847.5,2580.43 1912.5,2580.43 2000,2580.43 2065,2580.43 1847.5,2619.96 1912.5,2619.96 2000,2619.96 2065,2619.96 1847.5,2660 1912.5,2660 2000,2660 2065,2660
NetC18_2: C18.2 D2.1 R2.1 R8.2 U1.2 | length 498.8
  Top Layer w10: U1.2 2481.82,2900.25 2481.82,2931.04 2545.5,2994.72 2570.82,2994.72 2577.2,3001.1 2577.2,3014.72 2584.02,3021.54 R8.2 ; C18.2 2547.91,3159.76 D2.1 v1(2596.73,3176.47) ; v1(2590,3004.34) 2588.9,3005.44 2588.9,3017.64 R8.2 ; R2.1 R8.2
  Bottom Layer w10: v1(2590,3004.34) 2590,3041.83 2605.87,3057.71 2605.87,3165.78 2596.73,3174.92 v1(2596.73,3176.47)
NetC19_2: C19.2 R4.1 U1.5 | length 680.2
  Top Layer w10: U1.5 2402.8,2946.14 2448.91,2992.26 2448.91,3015.91 C19.2
  Bottom Layer w10: v1(2404.13,2869.13) 2388.25,2885 2305,2885 2260,2840 2260,2755 2410,2605 v1(2410,2536.27)
NetC20_2: C20.2 U1.7 | length 146.4
  Top Layer w10: U1.7 2351.61,2944.45 2401.89,2994.72 2401.89,3016.69 C20.2
NetC21_2: C21.2 R9.2 | length 56.5
  Bottom Layer w10: R9.2 C21.2
NetC22_1: C22.1 C23.1 C26.2 R15.2 R16.1 U1.8 | length 328.5
  Top Layer w10: C26.2 R16.1 R15.2 2368.37,3103.37 2368.37,3016.63 C22.1 2365.82,3014.09 2365.82,2987.2 2326.02,2947.4 U1.8
NetC22_2: C22.2 R10.1 U1.9 | length 164.7
  Top Layer w10: R10.1 R10.1@2298.18,3020.08 ; U1.9 2298.18,2900.25 R10.1@2298.18,3020.08 ; C22.2 2329.13,3019.13 2299.13,3019.13 R10.1@2298.18,3020.08
NetC23_2: C23.2 R10.2 | length 39.6
  Top Layer w10: R10.2 2296.63,3058.37 2331.63,3058.37 C23.2
NetC27_1: C27.1 R17.1 | length 394.3
  Bottom Layer w10: v1(3070,2830) 3080.87,2840.87 3080.87,3168.45 v1(3117.17,3204.74)
NetC27_2: C27.2 U2.1 | length 101.5
  Top Layer w10: U2.1 3060,3222.41 3081.54,3243.95 3127.22,3243.95 C27.2
NetC35_2: C35.2 R22.1 U2.6 | length 168.6
  Top Layer w10: R22.1 2903.58,2842.05 2936.38,2842.05 2949.69,2855.35 C35.2 2960,2866.65 U2.6
NetC36_2: C36.2 R19.2 | length 52.8
  Top Layer w10: C36.2 R19.2
NetC37_2: C37.2 R22.2 | length 56.5
  Top Layer w10: R22.2 2900.71,2804.29 2936.38,2804.29 2949.68,2790.98 C37.2
NetD1_1: D1.1 Q1.4 R1.1 | length 272.7
  Top Layer w10: Q1.4 2194.2,2674.2 2194.2,2527.76 2240.98,2480.98 2240.98,2449.21 D1.1@2226.77,2435
NetD1_2: D1.2 R1.2 U1.19 | length 515.5
  Top Layer w8: R1.2@2274.45,2470 2274.45,2450.31 2289.76,2435 2463.66,2435 2547.91,2519.25 2547.91,2574.27 2482.82,2639.37 2482.82,2668.75 U1.19
NetD5_A: D5.A R3.2 | length 85
  Top Layer w10: R3.2 D5.A@1905,3799.96
NetD6_1: D6.1 Q2.4 R6.1 | length 116.4
  Top Layer w10: R6.1 1764.88,2828.39 1800.12,2828.39 D6.1 1802.5,2821 1802.5,2760.77 Q2.4
NetD6_2: D6.2 R6.2 U1.15 | length 774.8
  Top Layer w10: R6.2 1762.56,2869.29 1787.8,2869.29 1795,2876.5 v1(1802.5,2869) ; v1(2365,2618.27) 2365,2619.82 2374.95,2629.78 2374.95,2669.75 U1.15
  Bottom Layer w10: v1(1802.5,2869) 1951,2869 2201.73,2618.27 v1(2365,2618.27)
NetD7_3: D7.3 L2.1 R17.2 R19.1 U2.8 | length 60.6
  Top Layer w10: R17.2 R19.1
  other v1: 3117.17,2901.73 3156.7,2901.73 3196.74,2901.73 3117.17,2966.73 3156.7,2966.73 3196.74,2966.73 3390,3005 3433.47,3005 3472.99,3005 3513.03,3005
NetD8_A: D8.A R18.2 | length 149.4
  Top Layer w10: D8.A@3200,3837.54 3200,3849.04 3209.04,3840 3292.3,3840 3300,3832.3 ; R18.2@3315,3830 3302.3,3830 3300,3832.3 ; R18.2 3300,3832.3
NetQ2_1: Q2.1 Q2.2 Q2.3 R11.2 R13.1 | length 623.3
  Top Layer w10: Q2.3 Q2.2 ; R13.1@1895,2856.34 1900,2851.34 Q2.2 ; Q2.1 Q2.2
  Bottom Layer w10: v1(1960,2828.39) 1960,2820 2225,2555 v1(2265,2555)
NetR5_1: R5.1 U1.4 | length 153.3
  Top Layer w10: U1.4 2430.64,2900.25 2430.64,2943.75 2500.2,3013.31 R5.1
NetR7_2: R7.2 U1.3 | length 161.9
  Top Layer w10: U1.3 2456.23,2900.25 2456.23,2933.55 2544.21,3021.54 R7.2
NetR11_1: R11.1 U1.12 | length 102.5
  Top Layer w10: R11.1 2269.64,2586.37 2269.64,2610.28 2298.18,2638.82 2298.18,2669.75 U1.12
NetR12_2: R12.2 U1.11 | length 111.8
  Top Layer w10: R12.2 2220.98,2583.46 2249,2611.48 2249,2646.16 U1.11
NetR14_1: R14.1 U1.13 | length 109.1
  Top Layer w10: R14.1 2312.36,2583.46 2295.55,2600.28 2295.55,2610.73 2323.77,2638.96 2323.77,2669.75 U1.13
NetR21_1: R21.1 R25.2 U2.3 | length 284.9
  Top Layer w10: R25.2 2844.38,3144.69 2933.22,3144.69 2960,3171.47 U2.3 2960,3245 2915.31,3289.69 R21.1
NetR23_2: R23.2 U2.4 | length 177.7
  Top Layer w10: R23.2 2780,3136.3 2820.17,3176.47 2901.89,3176.47 2910,3184.58 U2.4
VCC: C25.2 D4.1 R4.2 U1.16 | length 187
  Top Layer w10: C25.2 2383.43,2600.16 2402.8,2600.16 ; U1.16 2402.8,2600.16 ; D4.1@2450.16,2601.34 2434.36,2585.54 2413.81,2585.54 R4.2 2402.8,2588.94 2402.8,2600.16
pads on no net: H13.3 H13.4 H14.3 H14.4 H15.3 H15.4 H16.3 H16.4 H17.3 H17.4 H18.3 H18.4 H25.3 H25.4 H26.3 H26.4 H27.3 H27.4 H28.3 H28.4 H29.3 H29.4 H30.3 H30.4 H31.3 H31.4 H38.0 H39.0 H40.0

## Polygon pours and split planes (outlines as drawn)
no net on Top Layer "Top Layer-No Net" (solid, remove dead copper, pour order 78): 1309.1,4655
GND on Top Layer "Top Layer-GND" (solid, remove dead copper, pour order 76): 2210,2560 2210,2536.27 2251.27,2495 2308.35,2495 2339.65,2463.7 2405,2463.7 2405,2504.13 2377.2,2531.92 2377.2,2560
GND on Top Layer "Top Layer-GND 1" (solid, remove dead copper, pour order 74): 2266.73,2730 2266.73,2845 2545.2,2845 2545.2,2730.2 2540,2730 2535,2730
no net on Top Layer "Top Layer-No Net 1" (solid, remove dead copper, pour order 72): 2307.5,2725
+24_1 on Top Layer "Top Layer-+24_1" (solid, remove dead copper, pour order 68): 3994.61,3112.5 5189.61,3112.5 5189.61,4940 3994.61,4940
+24_2 on Top Layer "Top Layer-+24_2" (solid, remove dead copper, pour order 66): 5490,3115 6685,3115 6685,4940 5490,4940
GND on Top Layer "Top Layer-GND 2" (solid, remove dead copper, pour order 60): 2520,3075 2531.1,3063.9 2531.1,3040 2600,3040 2600,3065 2577.13,3065 2564.92,3077.2 2564.92,3130.08 2560,3135 2390,3135 2390,3045 2470,3045 2470,3065 2480,3075
no net on Top Layer "Top Layer-No Net 2" (solid, remove dead copper, pour order 58): 2395,3045
no net on Top Layer "Top Layer-No Net 3" (solid, remove dead copper, pour order 52): 2307.5,2725
GND on Top Layer "Top Layer-GND 3" (solid, remove dead copper, pour order 50): 2918.89,3030 2860,2990 2770,2990 2760,3000 2760,3102.2 2817.2,3102.2 2870.24,3102.2 2917.5,3130
GND on Top Layer "Top Layer-GND 4" (solid, remove dead copper, pour order 48): 2985,3038.73 2985,2762.24 2997.24,2750 3105,2750 3110,2755 3110,2795 3101.73,2803.27 3046.73,2803.27 3035,2815 3035,3040
no net on Top Layer "Top Layer-No Net 4" (solid, remove dead copper, pour order 46): 2985,2950
no net on Top Layer "Top Layer-No Net 5" (solid, remove dead copper, pour order 44): 2995,2770
no net on Top Layer "Top Layer-No Net 6" (solid, remove dead copper, pour order 42): 2990,3030
NetD7_3 on Top Layer "Top Layer-NetD7_3" (solid, remove dead copper, pour order 40): 3045,2900 3088.66,2856.34 3355,2856.34 3468.66,2970 3576.34,2970 3580,2973.66 3580,3060 3440,3060 3425,3045 3195,3045 3154.34,3004.34 3080,3004.34 3054.62,3004.34 3045,2994.72
GND on Top Layer "Top Layer-GND 5" (solid, remove dead copper, pour order 36): 2917.5,3130 3095,3130 3170,3198.08 3170,3255.58 3100.58,3325 3080,3325 3080,3745 3140,3805 3250,3805 3275,3805 3410,3670 3410,3175.63 3342.77,3075 3174.67,3075 3120,3030 2915.31,3030
+5 on Top Layer "Top Layer-+5" (solid, remove dead copper, pour order 34): 3440,3630 3420,3630 3420,3665 3485,3665 3505,3645 3710,3645 3710,3475 3715,3470 3584.29,3339.29 3584.29,3215 3440,3210
no net on Top Layer "Top Layer-No Net 7" (solid, remove dead copper, pour order 32): 3445,3195
+5F on Top Layer "Top Layer-+5F" (solid, remove dead copper, pour order 30): 3710,3725 3705,3730 3560,3730 3560,3805 3465,3900 3050,3900 2950,3900 2865,3985 2865,4105 2935,4175 3665,4175 3775,4065 3775,3790
+12F on Top Layer "Top Layer-+12F" (solid, remove dead copper, pour order 28): 1115,4090 1195,4170 1895,4170 1926.34,4138.66 1926.34,3989.69 1900,3965 1881.33,3947.5 1392.5,3947.5 1345,3947.5 1280,3904.05 1280,3835 1280,3680 1120,3680 1115,3685
+12 on Top Layer "Top Layer-+12" (solid, remove dead copper, pour order 26): 1340,3620 1115,3620 1095,3600 1095,3455 1090,3450 1110,3430 1345,3430 1360,3445
+12 on Top Layer "Top Layer-+12 1" (solid, remove dead copper, pour order 24): 1394.76,2765 1550,2765 1545,2770 1545,3045 1515,3075 1515,3855 1490,3880 1370,3880 1335,3845 1335,2969.45 1394.76,2909.69
GND on Top Layer "Top Layer-GND 6" (solid, remove dead copper, pour order 22): 1735,3870 1760,3845 1760,3785 1935,3610 1990,3555 1990,2910 1570,2910 1570,3840 1600,3870
NetQ2_1 on Top Layer "Top Layer-NetQ2_1" (solid, remove dead copper, pour order 18): 1835,2730 1965,2730 1965,2845 1935,2880 1860,2880 1835,2845
NetC1_2 on Top Layer "Top Layer-NetC1_2" (solid, remove dead copper, pour order 16): 1903.66,2315 2165,2576.34 2165,2710 1775,2710 1765,2700 1765,2645.04 1544.96,2425 1394.76,2425 1385,2415.24 1385,2335 1405,2315
+24 on Top Layer "Top Layer-+24" (solid, remove dead copper, pour order 14): 3770,4655 3770,4860 3710,4920 1080,4920 1080,4393.78 1130,4343.78 1917.61,4343.78 2015,4246.39 2015,2730 2039.69,2730 2225,2730 2225,3170 2390,3335 2875,3335 2926.39,3335 2995,3240 2995,3169.48 2999.48,3165 3030,3165 3030,3705 2805,3930 2805,4255 2910,4360 3685,4360 3770,4445
no net on Top Layer "Top Layer-No Net 8" (solid, remove dead copper, pour order 6): 2025,2730
no net on Top Layer "Top Layer-No Net 9" (solid, remove dead copper, pour order 4): 2015,2725
no net on Top Layer "Top Layer-No Net 10" (solid, remove dead copper, pour order 2): 2443.46,4440
no net on Top Layer "Top Layer-No Net 11" (solid, remove dead copper, pour order 0): 2403.27,4440
GND2 on Bottom Layer "Bottom Layer-GND2" (solid, remove dead copper, pour order 88): 6740,2740 5438.75,2740 5438.75,4960 6740,4960
GND1 on Bottom Layer "Bottom Layer-GND1" (solid, remove dead copper, pour order 84): 5300,2760 3998.75,2760 3998.75,4960 5300,4960
GND on Bottom Layer "Bottom Layer-GND" (solid, remove dead copper, pour order 82): 3840,3418.82 3283.22,3418.81 3283.22,2690 1740,2690 1740,2895 1691.25,2943.75 1000,2943.75 1000,5000 3840,5000
no net on Layer 1 (split plane): 1005.21,2200 1005.08,2200.43
NetC1_2 on Layer 1 (split plane): 2144.93,2566.24 1893.76,2315.07 1395.07,2315.07 1395.07,2424.93 1680,2424.93 1680.83,2425.01 1681.67,2425.02 1682.3,2425.15 1682.94,2425.22 1683.74,2425.46 1684.56,2425.63 1685.15,2425.89 1685.77,2426.07 1686.5,2426.47 1687.27,2426.8 1687.81,2427.16 1688.37,2427.47 1689.02,2428 1689.71,2428.47 1784.71,2508.47 1785.16,2508.93 1785.66,2509.34 1786.19,2509.99 1786.77,2510.59 1787.12,2511.13 1787.53,2511.63 1787.93,2512.36 1788.38,2513.06 1788.62,2513.66 1788.93,2514.23 1789.17,2515.03 1789.48,2515.81 1789.6,2516.44 1789.78,2517.06 1789.87,2517.89 1790.02,2518.71 1790.01,2519.36 1790.07,2520 1790.07,2684.93 2144.93,2684.93
+12F on Layer 1 (split plane): 169 vertices, not listed, extent 1004.74,2024.74 3872.83,3324.93
GND on Layer 1 (split plane): 1983.81,2993.17 1983.81,2993.11 1983.8,2993.04 1983.8,2916.8 1555.07,2916.8 1555.07,3854.93 1991.43,3854.93
+12 on Layer 1 (split plane): 1524.93,2773.52 1395.07,2775.07 1395.07,2920 1394.78,2922.94 1393.93,2925.77 1392.53,2928.37 1390.66,2930.66 1350.66,2970.66 1348.37,2972.53 1345.77,2973.93 1342.94,2974.78 1340,2975.07 1015.07,2975.07 1015.07,3604.93 1340,3604.93 1342.94,3605.22 1345.77,3606.07 1348.37,3607.47 1350.66,3609.34 1352.53,3611.63 1353.93,3614.23 1354.78,3617.06 1355.07,3620 1355.07,3854.93 1524.93,3854.93
+12F on Layer 1 (split plane): 1005.22,4197.06 1006.07,4194.23 1007.47,4191.63 1009.34,4189.34 1011.63,4187.47 1014.23,4186.07 1017.06,4185.22 1020,4184.93 1994.35,4184.93 1991.69,3885.07 1340,3885.07 1337.06,3884.78 1334.23,3883.93 1331.63,3882.53 1329.34,3880.66 1327.47,3878.37 1326.07,3875.77 1325.22,3872.94 1324.93,3870 1324.93,3635.07 1005.08,3635.07 1005.08,4198.43
+24 on Layer 1 (split plane): 1168.98,4995.21 1170,4994.79 1170,4995.21 1172.96,4994.92 3874.92,4994.92 3873.95,4215.07 2840,4215.07 2837.06,4214.78 2834.23,4213.93 2831.63,4212.53 2829.34,4210.66 2827.47,4208.37 2826.07,4205.77 2825.22,4202.94 2824.93,4200 2824.93,4000 2825.22,3997.06 2826.07,3994.23 2827.47,3991.63 2829.34,3989.34 3004.93,3813.76 3004.93,2864.62 3004.08,2863.93 3002.21,2861.64 3000.82,2859.04 2999.96,2856.21 2999.67,2853.27 2999.96,2850.33 3000.82,2847.5 3002.21,2844.89 3004.08,2842.61 3004.93,2841.92 3004.93,2755.07 2013.95,2755.07 2013.95,2992.98 2024.62,4199.87 2024.62,4199.93 2024.63,4200 2024.49,4201.41 2024.36,4202.81 2024.34,4202.87 2024.34,4202.94 2023.93,4204.29 2023.53,4205.64 2023.5,4205.7 2023.48,4205.77 2022.81,4207.01 2022.16,4208.26 2022.12,4208.31 2022.09,4208.37 2021.19,4209.46 2020.3,4210.56 2020.25,4210.61 2020.21,4210.66 2019.12,4211.55 2018.04,4212.46 2017.98,4212.49 2017.93,4212.53 2016.68,4213.2 2015.44,4213.87 2015.38,4213.89 2015.32,4213.93 2013.97,4214.34 2012.62,4214.76 2012.56,4214.76 2012.49,4214.78 2011.09,4214.92 2009.69,4215.07 2009.62,4215.07 2009.55,4215.07 1020,4215.07 1017.06,4214.78 1014.23,4213.93 1011.63,4212.53 1009.34,4210.66 1007.47,4208.37 1006.07,4205.77 1005.22,4202.94 1005.08,4201.57 1005.08,4827.04 1004.79,4830 1005.21,4830 1004.79,4831.02 1004.74,4831.01 1005.06,4840.81 1006.12,4851.58 1007.88,4862.25 1010.34,4872.78 1013.47,4883.13 1017.29,4893.26 1021.75,4903.11 1026.85,4912.65 1032.56,4921.83 1038.86,4930.63 1045.72,4938.99 1053.12,4946.88 1061.01,4954.28 1069.37,4961.14 1078.17,4967.44 1087.35,4973.15 1096.89,4978.25 1106.74,4982.71 1116.87,4986.53 1127.22,4989.66 1137.75,4992.12 1148.42,4993.88 1159.19,4994.94 1168.99,4995.26
+24_1 on Layer 1 (split plane): 5317.06,4994.78 5314.23,4993.93 5311.63,4992.53 5309.34,4990.66 5307.47,4988.37 5306.07,4985.77 5305.22,4982.94 5304.93,4980 5304.93,2025.08 3901.35,2025.08 3903,3340 3904.07,4194.7 3904.78,4197.06 3905.07,4200 3904.78,4202.94 3904.08,4205.26 3905.07,4994.92 5318.43,4994.92
no net on Layer 1 (split plane): 6830.67,2024.72 6830.56,2024.74
+24_2 on Layer 1 (split plane): 6840.81,4994.94 6851.58,4993.88 6862.25,4992.12 6872.78,4989.66 6883.13,4986.53 6893.26,4982.71 6903.11,4978.25 6912.65,4973.15 6921.83,4967.44 6930.63,4961.14 6938.99,4954.28 6946.88,4946.88 6954.28,4938.99 6961.14,4930.63 6967.44,4921.83 6973.15,4912.65 6978.25,4903.11 6982.71,4893.26 6986.53,4883.13 6989.66,4872.78 6992.12,4862.25 6993.88,4851.58 6994.94,4840.81 6995.26,4831.01 6995.21,4831.02 6994.79,4830 6995.21,4830 6994.92,4827.04 6994.92,2192.96 6995.21,2190 6994.79,2190 6995.21,2188.98 6995.26,2188.99 6994.94,2179.19 6993.88,2168.42 6992.12,2157.75 6989.66,2147.22 6986.53,2136.87 6982.71,2126.74 6978.25,2116.89 6973.15,2107.35 6967.44,2098.17 6961.14,2089.37 6954.28,2081.01 6946.88,2073.12 6938.99,2065.72 6930.63,2058.86 6921.83,2052.56 6912.65,2046.85 6903.11,2041.75 6893.26,2037.29 6883.13,2033.47 6872.78,2030.34 6862.25,2027.88 6851.58,2026.12 6840.81,2025.06 6831.01,2024.74 6831.02,2024.79 6830,2025.21 6830,2024.79 6827.04,2025.08 5335.07,2025.08 5335.07,4980 5334.78,4982.94 5333.93,4985.77 5332.53,4988.37 5330.66,4990.66 5328.37,4992.53 5325.77,4993.93 5322.94,4994.78 5321.57,4994.92 6827.04,4994.92 6830,4995.21 6830,4994.79 6831.02,4995.21 6831.01,4995.26
NetD7_3 on Layer 1 (split plane): 3563.63,2868.34 3035.07,2868.34 3035.07,3044.93 3563.63,3044.93
GND on Layer 1 (split plane): 3544.93,3806.85 3544.93,3735.18 3440.05,3735.51 3440.02,3735.5 3440,3735.51 3438.54,3735.36 3437.11,3735.23 3437.08,3735.22 3437.06,3735.22 3435.66,3734.79 3434.28,3734.38 3434.25,3734.37 3434.23,3734.36 3432.95,3733.67 3431.66,3732.99 3431.65,3732.98 3431.63,3732.97 3430.5,3732.04 3429.38,3731.12 3429.36,3731.11 3429.34,3731.09 3428.42,3729.97 3427.49,3728.85 3427.48,3728.83 3427.47,3728.81 3426.78,3727.52 3426.09,3726.25 3426.09,3726.22 3426.07,3726.2 3425.65,3724.8 3425.23,3723.42 3425.22,3723.4 3425.22,3723.37 3425.07,3721.92 3424.93,3720.48 3424.93,3720.46 3424.93,3720.43 3424.93,3712.13 3419.93,3213.44 3418.07,3075.07 3035.07,3075.07 3035.07,3820 3034.78,3822.94 3033.93,3825.77 3032.53,3828.37 3030.66,3830.66 2976.39,3884.93 3454.4,3884.93
+5 on Layer 1 (split plane): 3872.87,3355.07 3582.89,3355.07 3581.6,3354.94 3580.29,3354.85 3580.13,3354.8 3579.95,3354.78 3578.7,3354.4 3577.45,3354.05 3577.29,3353.98 3577.13,3353.93 3575.97,3353.31 3574.81,3352.72 3574.67,3352.61 3574.52,3352.53 3573.51,3351.7 3572.48,3350.9 3572.37,3350.77 3572.24,3350.66 3571.41,3349.65 3570.56,3348.66 3570.47,3348.51 3570.36,3348.37 3569.75,3347.22 3569.1,3346.08 3569.05,3345.92 3568.97,3345.77 3568.59,3344.52 3568.18,3343.28 3568.16,3343.11 3568.11,3342.94 3567.98,3341.64 3567.83,3340.34 3565.27,3228.48 3450.22,3228.36 3455.01,3705.31 3579.95,3704.93 3582.89,3705.21 3583.41,3705.36 3873.31,3705.36
+5F on Layer 1 (split plane): 3873.35,3735.51 3575.07,3735.51 3575.07,3813.76 3575.02,3814.31 3575.03,3814.87 3574.87,3815.78 3574.78,3816.7 3574.62,3817.23 3574.53,3817.78 3574.19,3818.64 3573.93,3819.52 3573.66,3820.02 3573.46,3820.53 3572.97,3821.32 3572.53,3822.13 3572.18,3822.56 3571.88,3823.03 3571.24,3823.7 3570.66,3824.41 3570.23,3824.77 3569.84,3825.17 3469.84,3911.41 3469.09,3911.95 3468.37,3912.53 3467.88,3912.79 3467.43,3913.12 3466.58,3913.49 3465.77,3913.93 3465.24,3914.09 3464.73,3914.31 3463.83,3914.51 3462.94,3914.78 3462.39,3914.84 3461.84,3914.96 3460.92,3914.98 3460,3915.07 2946.24,3915.07 2855.07,4006.24 2855.07,4184.93 3873.91,4184.93
GND on Layer 2 (split plane): 1168.98,4995.21 1170,4994.79 1170,4995.21 1172.96,4994.92 3879.87,4994.92 3876.18,2025.08 1181.02,2025.08 1180,2025.5 1180,2025.21 1180.43,2025.08 1180,2025.21 1179.34,2025.41 1175.42,2025.8 1171.5,2025.41 1170,2024.96 1170,2025.21 1168.86,2024.74 1159.19,2025.06 1148.42,2026.12 1137.75,2027.88 1127.22,2030.34 1116.87,2033.47 1106.74,2037.29 1096.89,2041.75 1087.35,2046.85 1078.17,2052.56 1069.37,2058.86 1061.01,2065.72 1053.12,2073.12 1045.72,2081.01 1038.86,2089.37 1032.56,2098.17 1026.85,2107.35 1021.75,2116.89 1017.29,2126.74 1013.47,2136.87 1010.34,2147.22 1007.88,2157.75 1006.12,2168.42 1005.06,2179.19 1004.74,2188.86 1005.21,2190 1004.96,2190 1005.41,2191.5 1005.8,2195.42 1005.41,2199.34 1005.21,2200 1005.5,2200 1005.08,2201.02 1005.08,4827.04 1004.79,4830 1005.21,4830 1004.79,4831.02 1004.74,4831.01 1005.06,4840.81 1006.12,4851.58 1007.88,4862.25 1010.34,4872.78 1013.47,4883.13 1017.29,4893.26 1021.75,4903.11 1026.85,4912.65 1032.56,4921.83 1038.86,4930.63 1045.72,4938.99 1053.12,4946.88 1061.01,4954.28 1069.37,4961.14 1078.17,4967.44 1087.35,4973.15 1096.89,4978.25 1106.74,4982.71 1116.87,4986.53 1127.22,4989.66 1137.75,4992.12 1148.42,4993.88 1159.19,4994.94 1168.99,4995.26
no net on Layer 2 (split plane): 1005.21,2200 1005.08,2200.43
GND2 on Layer 2 (split plane): 6840.81,4994.94 6851.58,4993.88 6862.25,4992.12 6872.78,4989.66 6883.13,4986.53 6893.26,4982.71 6903.11,4978.25 6912.65,4973.15 6921.83,4967.44 6930.63,4961.14 6938.99,4954.28 6946.88,4946.88 6954.28,4938.99 6961.14,4930.63 6967.44,4921.83 6973.15,4912.65 6978.25,4903.11 6982.71,4893.26 6986.53,4883.13 6989.66,4872.78 6992.12,4862.25 6993.88,4851.58 6994.94,4840.81 6995.26,4831.01 6995.21,4831.02 6994.79,4830 6995.21,4830 6994.92,4827.04 6994.92,2192.96 6995.28,2189.33 6995.21,2190 6994.79,2190 6995.21,2188.98 6995.26,2188.99 6994.94,2179.19 6993.88,2168.42 6992.12,2157.75 6989.66,2147.22 6986.53,2136.87 6982.71,2126.74 6978.25,2116.89 6973.15,2107.35 6967.44,2098.17 6961.14,2089.37 6954.28,2081.01 6946.88,2073.12 6938.99,2065.72 6930.63,2058.86 6921.83,2052.56 6912.65,2046.85 6903.11,2041.75 6893.26,2037.29 6883.13,2033.47 6872.78,2030.34 6862.25,2027.88 6851.58,2026.12 6840.81,2025.06 6831.01,2024.74 6831.02,2024.79 6830,2025.21 6830,2024.79 6827.04,2025.08 5333.86,2025.08 5337.55,4994.92 6827.04,4994.92 6830,4995.21 6830,4994.79 6831.02,4995.21 6831.01,4995.26
GND1 on Layer 2 (split plane): 5303.71,2025.08 3906.32,2025.08 3910.02,4994.92 5307.41,4994.92

## Other copper
Layer 1 (plane layer: these items are gaps in the copper):
  lines w30: 1020,4200 2009.55,4200 1998.88,2993.04 1998.88,2740 2220,2740 3020,2740 3020,3820 2840,4000 2840,4200 3890,4200 ; 1380,2760 1380,2920 1340,2960 1000,2960 1000,3620 1340,3620 1340,3870 1540,3870 ; 1380,2760.18 1540,2758.27 1540,3870 ; 1550.53,2901.73 1993.11,2901.73 ; 2006.63,3870 1540,3870 ; 2940,3900 3460,3900 3560,3813.76 3560,3720.43 3888.4,3720.43 ; 3014.74,2853.27 3578.7,2853.27 3578.7,3060 3020,3060 ; 3432.95,3060 3435,3213.27 ; 3580,3720 3440,3720.43 3440,3712.06 3435,3213.27 ; 3886.26,2004.99 3890,5000 ; 3887.93,3340 3582.89,3340 3580,3213.42 3435,3213.27 ; 5320,2000 5320,4980 ; 1380,2300 1900,2300 2160,2560 2160,2700 1775,2700 1775,2520 1680,2440 1380,2440 1380,2300
Layer 2 (plane layer: these items are gaps in the copper):
  lines w30: 3891.24,2016.8 3895,5039.98 ; 5318.76,2004.99 5322.5,5010

## Silkscreen, mask and mechanical layers (free items; w line width, h text height)
Top Overlay:
  text "OUYJY  &  CRK" at 2690,2060 h60
Mechanical 1:
  lines w30: 999.71,2190 ccw(c1170,2190) 1170,2019.71 ; 999.71,4830 cw(c1170,4830) 1170,5000.29 ; 1000,2200 1000,4830.29 ; 1169.71,5000 6830,5000 ; 1180,2020 6830,2020 ; 6830,2019.71 ccw(c6830,2190) 7000.29,2190 ; 6830,5000.29 cw(c6830,4830) 7000.29,4830 ; 7000,2190 7000,4830